# Altium PCB SpaceVNXBaseBoard.PcbDoc
Units mm, origin at the board's own origin, x right, y up, seen from the top; angles counter-clockwise.
Board outline 73 x 84 mm, 2 copper layers (Top Layer, Bottom Layer); 5 components, 0 nets, 108 pads, 0 vias.
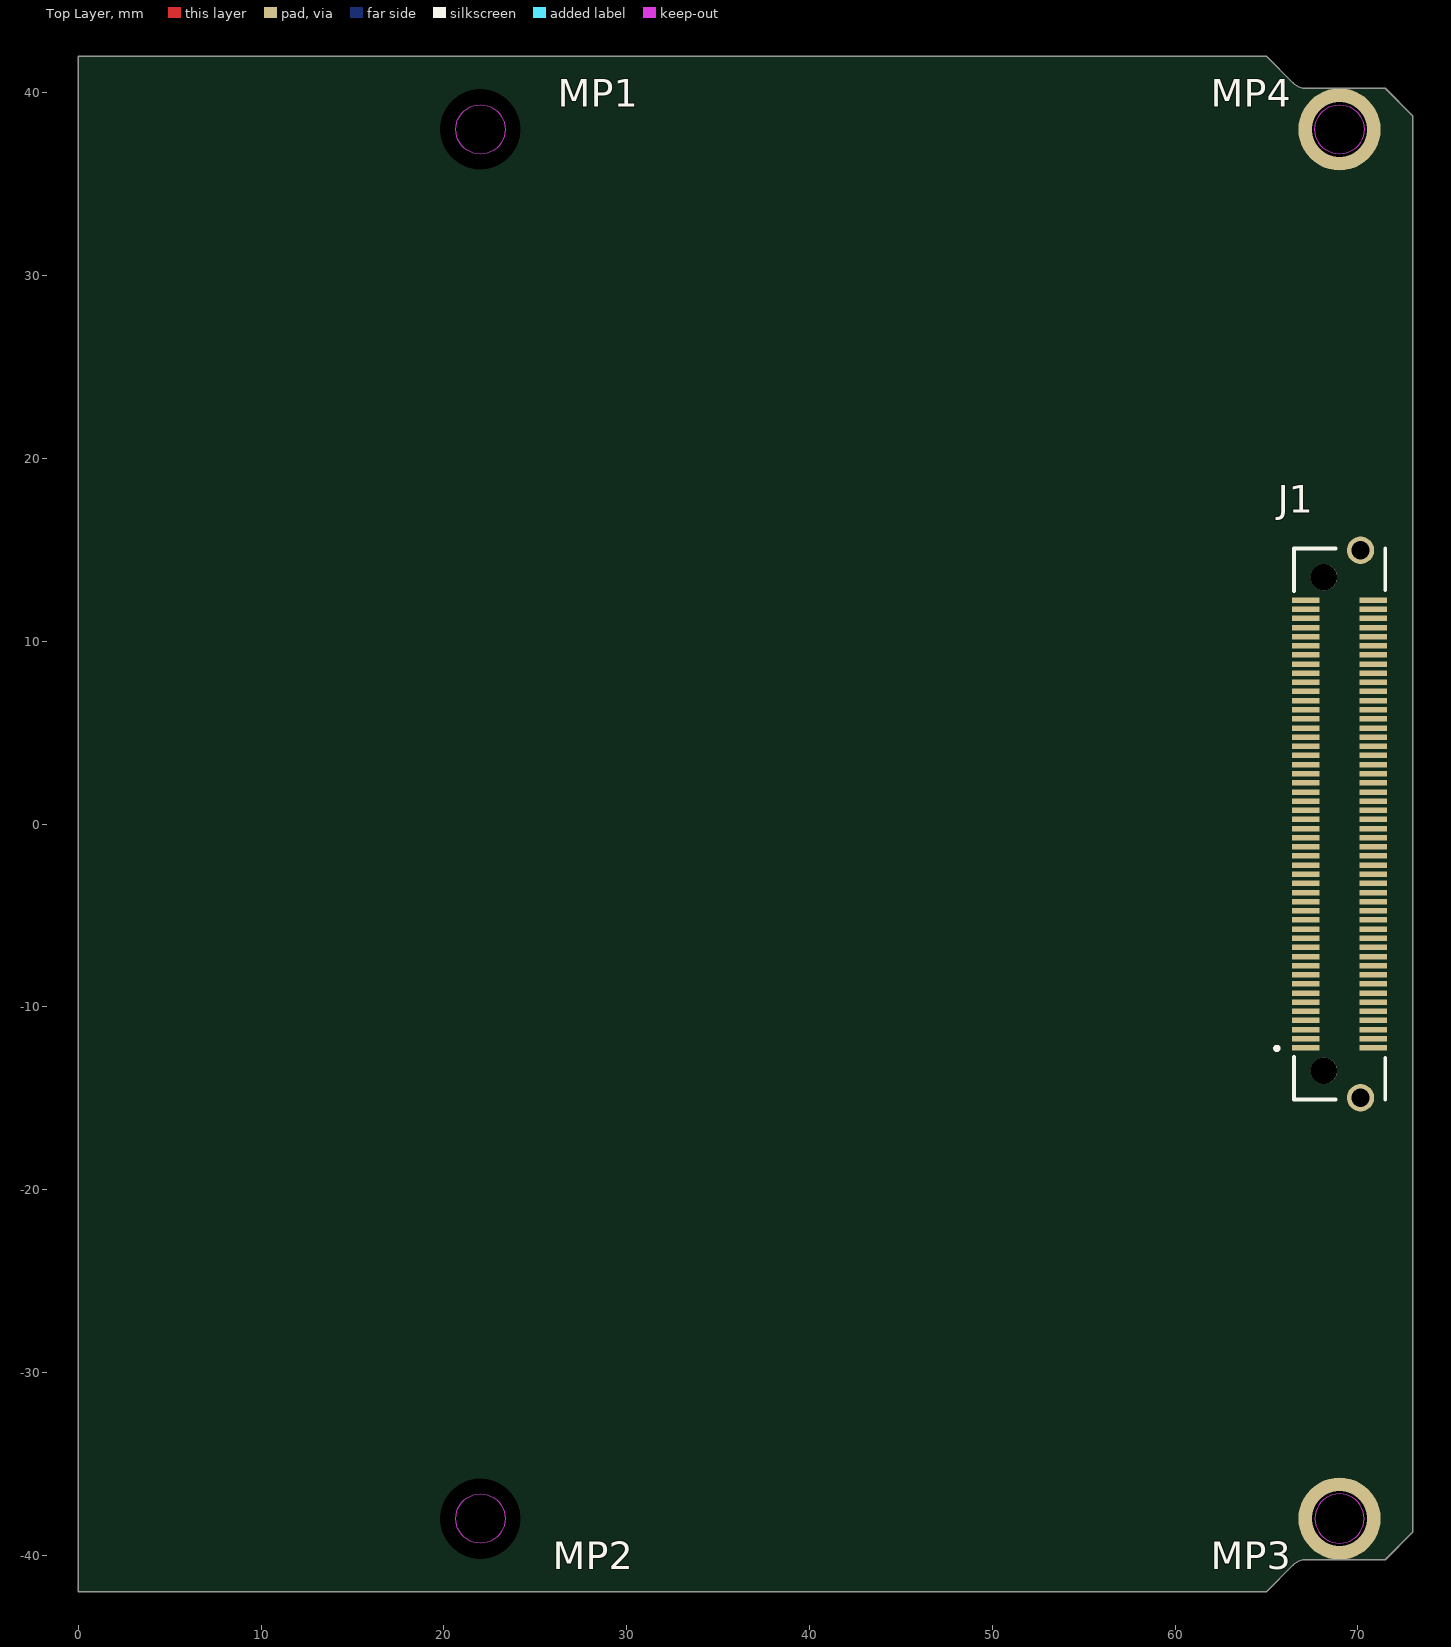
[diagram p0: Top Layer view]
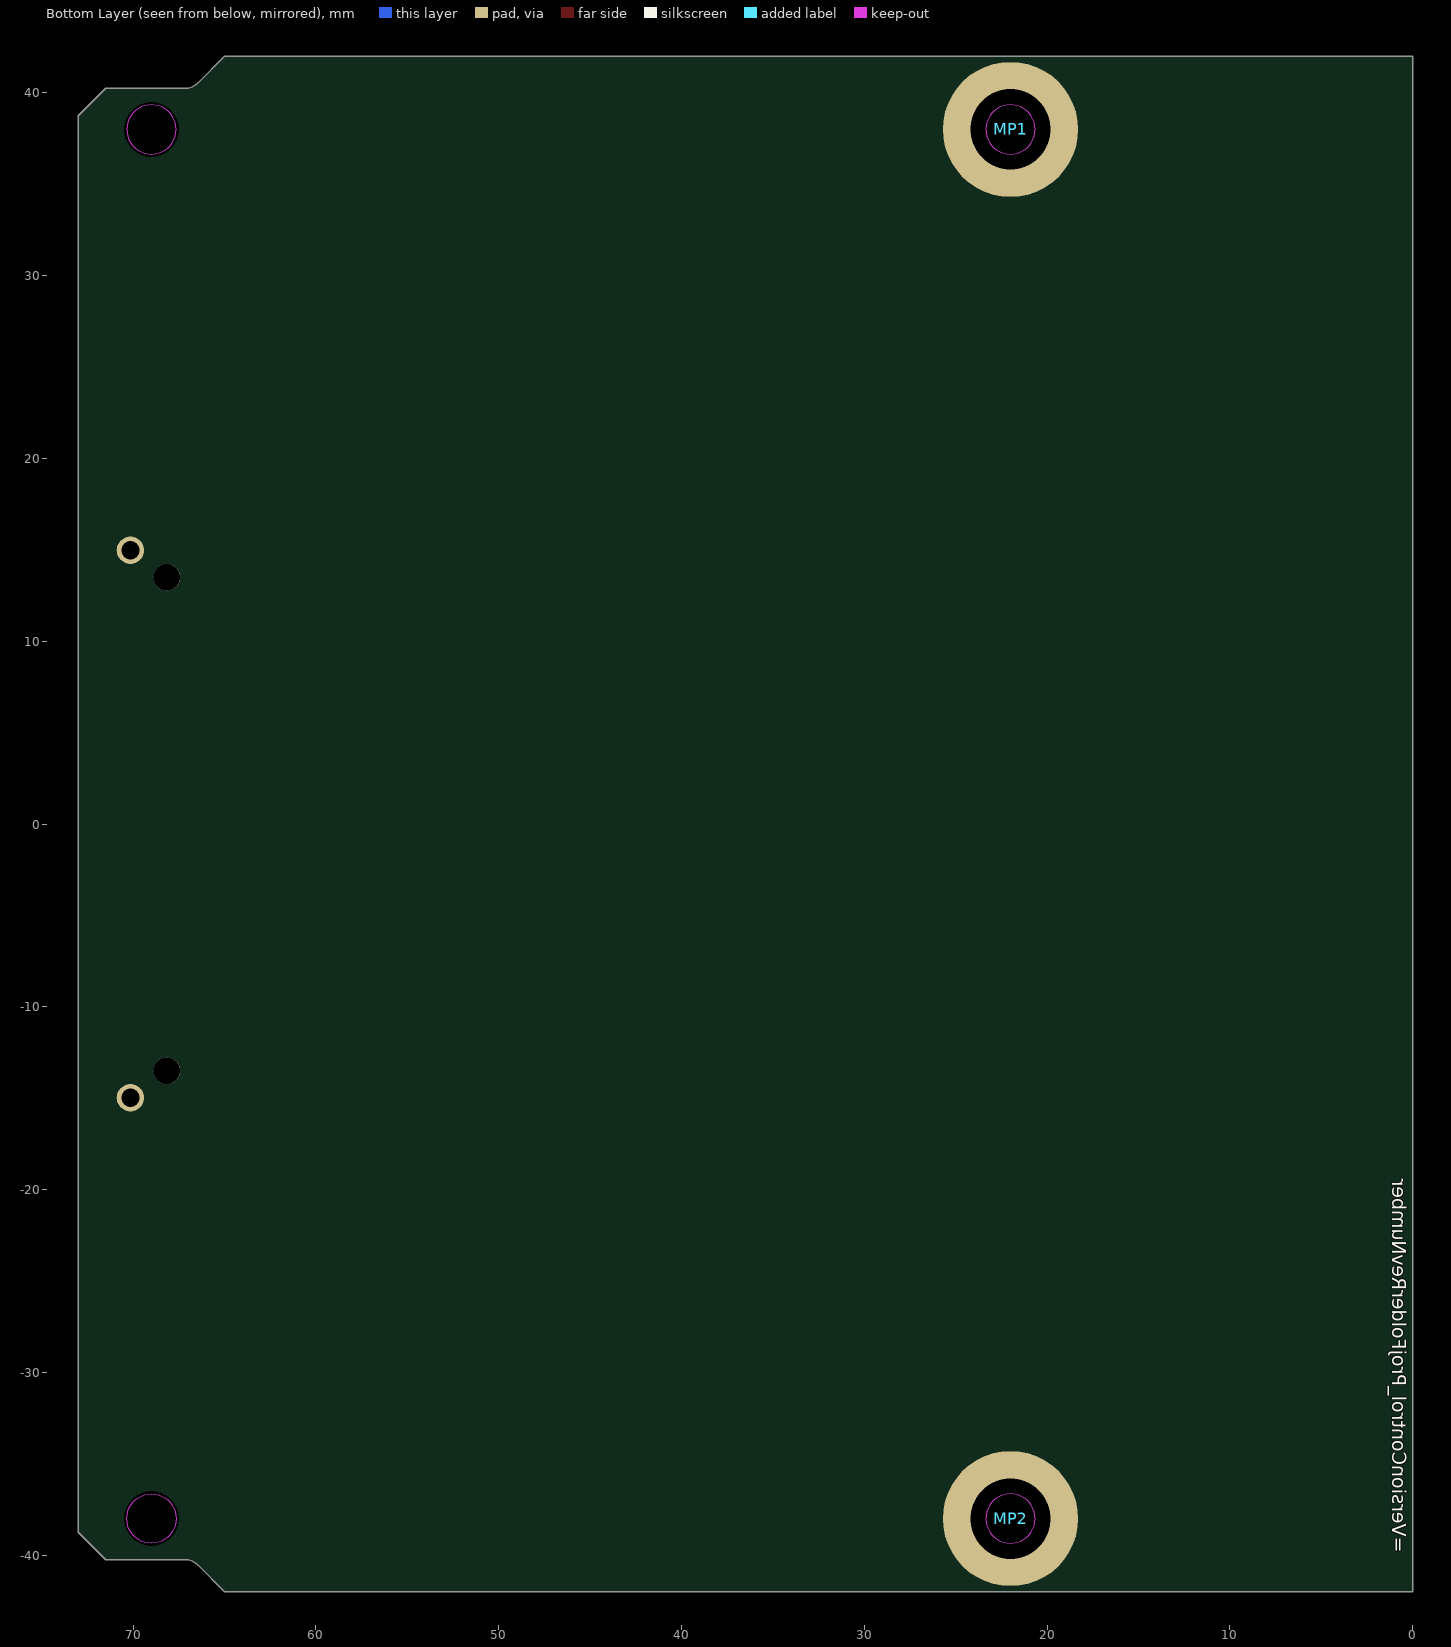
[diagram p1: Bottom Layer view, seen from below]

## Layer stack, top to bottom
Top Solder: solder mask 0.0102, Solder Resist, Dk 3.5
Top Layer: signal copper 0.0356
Dielectric 1: dielectric 0.32, FR-4, Dk 4.8
Bottom Layer: signal copper 0.0356
Bottom Solder: solder mask 0.0102, Solder Resist, Dk 3.5

## Board outline
0,-42 0,42 65,42 66.457,40.543 ccw(c67.164,41.25) 67.164,40.25 71.5,40.25 73,38.75 73,-38.75 71.5,-40.25 67.164,-40.25 ccw(c67.164,-41.25) 66.457,-40.543 65,-42
cut-out: 20.65,-38 cw(c22,-38) 22,-36.65 cw(c22,-38) 23.35,-38 cw(c22,-38) 22,-39.35 cw(c22,-38)
cut-out: 22,36.65 cw(c22,38) 20.65,38 cw(c22,38) 22,39.35 cw(c22,38) 23.35,38 cw(c22,38)
cut-out: 69,36.65 cw(c69,38) 67.65,38 cw(c69,38) 69,39.35 cw(c69,38) 70.35,38 cw(c69,38)
cut-out: 67.65,-38 ccw(c69,-38) 69,-39.35 ccw(c69,-38) 70.35,-38 ccw(c69,-38) 69,-36.65 ccw(c69,-38)

## Design rules (kind name [scope] priority, off if disabled: settings)
Clearance [All] p1: gap=0.254 ignorepadtopadclearanceinfootprint=FALSE except(0: Arc-Hole Track-Hole SMDPad-Hole THPad-Hole Via-Hole Fill-Hole Poly-Hole Region-Hole Text-Hole)
FanoutControl Fanout_BGA [IsBGA] p1: bgadir=Out bgaviamode=Centered fanoutstyle=BGA fanoutdirection=Alternating viagrid=0.025 // Fanout_BGA (Default Rule)
PolygonConnect [All] p1: connectstyle=Relief reliefconductorwidth=0.254 reliefentries=4 polygonreliefangle="90 Angle" airgapwidth=0.254
RoutingVias [All] p1: holewidth=0.711 width=1.27 viastyle="Through Hole" minholewidth=0.711 minwidth=1.27 maxholewidth=0.711 maxwidth=1.27
SolderMaskExpansion [All] p1: expansion=0.102 istentingtop=FALSE
Width [All] p1: maxlimit=0.254 minlimit=0.254 preferedwidth=0.254
29 further rules are at their usual default settings.

## Classes and differential pairs
component class SpaceVNXBaseBoard: MP1 MP2 MP3 MP4

## Components (designator, comment, footprint, x,y, rotation, side; value= is the part's Value field where it differs from the comment)
J1 "LSHM-150-02.5-L-DV-A-S-TR" SAMTEC_LSHM-150-02.5-L-DV-A-S-TR 69,0 r270 top
MP1 "M3x5.1mm" 9775051360 22,38 r180 bottom
MP2 "M3x5.1mm" 9775051360 22,-38 r180 bottom
MP3 "M2x5mm" 9774050243 69,-38 r0 top
MP4 "M2x5mm" 9774050243 69,38 r0 top

## Footprints (in the part's own frame and the unit in brackets; to place one, negate y for a bottom-side part, rotate by r counter-clockwise, add the part's x,y. Pads: shape width x height; smd on the part's side, far side on the other; paste and mask are expansions set on the pad)
9774050243 [mm] "SMT Steel Spacer with internal Thread M2, height 5mm"
  round 4.5 / inner round 0 / far side round 0 hole 3 unplated: 1(0,0)
  body extent -2.17,-2.17 2.18,2.17, height 5
9775051360 [mm] "SMD Steel Spacer M3 Thread Internal, Pin Length 5.1mm"
  round 7.4 / inner round 0 / far side round 0 hole 4.4 unplated paste-403.566: 1(0,0)
  body extent -3,-3 3,3, height 1
SAMTEC_LSHM-150-02.5-L-DV-A-S-TR [mm]
  rect 0.3x1.5 smd: 1(12.25,-1.85) 2(12.25,1.85) 3(11.75,-1.85) 4(11.75,1.85) 5(11.25,-1.85) 6(11.25,1.85) 7(10.75,-1.85) 8(10.75,1.85) 9(10.25,-1.85) 10(10.25,1.85) 11(9.75,-1.85) 12(9.75,1.85) 13(9.25,-1.85) 14(9.25,1.85) 15(8.75,-1.85) 16(8.75,1.85) 17(8.25,-1.85) 18(8.25,1.85) 19(7.75,-1.85) 20(7.75,1.85) 21(7.25,-1.85) 22(7.25,1.85) 23(6.75,-1.85) 24(6.75,1.85) 25(6.25,-1.85) 26(6.25,1.85) 27(5.75,-1.85) 28(5.75,1.85) 29(5.25,-1.85) 30(5.25,1.85) 31(4.75,-1.85) 32(4.75,1.85) 33(4.25,-1.85) 34(4.25,1.85) 35(3.75,-1.85) 36(3.75,1.85) 37(3.25,-1.85) 38(3.25,1.85) 39(2.75,-1.85) 40(2.75,1.85) 41(2.25,-1.85) 42(2.25,1.85) 43(1.75,-1.85) 44(1.75,1.85) 45(1.25,-1.85) 46(1.25,1.85) 47(0.75,-1.85) 48(0.75,1.85) 49(0.25,-1.85) 50(0.25,1.85) 51(-0.25,-1.85) 52(-0.25,1.85) 53(-0.75,-1.85) 54(-0.75,1.85) 55(-1.25,-1.85) 56(-1.25,1.85) 57(-1.75,-1.85) 58(-1.75,1.85) 59(-2.25,-1.85) 60(-2.25,1.85) 61(-2.75,-1.85) 62(-2.75,1.85) 63(-3.25,-1.85) 64(-3.25,1.85) 65(-3.75,-1.85) 66(-3.75,1.85) 67(-4.25,-1.85) 68(-4.25,1.85) 69(-4.75,-1.85) 70(-4.75,1.85) 71(-5.25,-1.85) 72(-5.25,1.85) 73(-5.75,-1.85) 74(-5.75,1.85) 75(-6.25,-1.85) 76(-6.25,1.85) 77(-6.75,-1.85) 78(-6.75,1.85) 79(-7.25,-1.85) 80(-7.25,1.85) 81(-7.75,-1.85) 82(-7.75,1.85) 83(-8.25,-1.85) 84(-8.25,1.85) 85(-8.75,-1.85) 86(-8.75,1.85) 87(-9.25,-1.85) 88(-9.25,1.85) 89(-9.75,-1.85) 90(-9.75,1.85) 91(-10.25,-1.85) 92(-10.25,1.85) 93(-10.75,-1.85) 94(-10.75,1.85) 95(-11.25,-1.85) 96(-11.25,1.85) 97(-11.75,-1.85) 98(-11.75,1.85) 99(-12.25,-1.85) 100(-12.25,1.85)
  round 1.5 hole 1: S1(-14.975,1.15) S2(14.975,1.15)
  round 1.45 hole 1.45 unplated: ""(-13.5,-0.85) ""(13.5,-0.85)
  silkscreen extent -15.07,-3.53 15.07,2.51, body extent -15.4,-2.49 15.4,2.54, height 3.8

## Part data
J1: "100 Position Connector Self Mating, Non-Gendered Surface Mount Gold", ComponentLink1Description=Manufacturer, ComponentLink1URL=https://www.samtec.com/products/lshm
MP1 MP2: library part 9775051360, "WA-SMSR SMT Steel Spacer Reverse with internal Thread M3, Length 5.1mm", Manufacturer="Wurth Elektronik", Operating Temperature="-55 to +150degC", ComponentLink1Description=Manufacturer, ComponentLink1URL=http://www.we-online.de, ComponentLink2Description=Datasheet, ComponentLink2URL=https://www.we-online.com/catalog/datasheet/9775051360.pdf, Hole Diameter=-, Inner Diameter=4.2mm, Manufacturer Part Number=9775051360, Material=Steel, Mounting Technology=SMT, Outer Diameter=6mm, Packaging=Bulk, Pin Length=5.1mm, Published Date="March 2021", Surface=Tin, Thread=M3
MP3 MP4: library part 9774050243, "WA-SMSI SMT Steel Spacer, internal Thread, OD 4.35mm, M2x5mm", Manufacturer="Wurth Elektronik", Operating Temperature="-55 to +150degC", ComponentLink1Description=Manufacturer, ComponentLink1URL=http://www.we-online.de, ComponentLink2Description=Datasheet, ComponentLink2URL=https://www.we-online.com/catalog/datasheet/9774050243.pdf, Inner Diameter=2.8mm, Inner Thread Length=-, Length=5mm, Manufacturer Part Number=9774050243, Material=Steel, Mounting Technology=SMT, Outer Diameter=4.35mm, Packaging=Bulk, Published Date="April 2020", Surface=Tin, Thread=M2

## Nets (pads, with @x,y where several pads share a name; then routed paths per layer and width w, separated by ;. In a path a pad name is that pad's centre, name@x,y a point inside that pad or via, vN(x,y) a via of type N, cw(c..) or ccw(c..) an arc to the next point about the centre after c; other vN are vias at no path point)
pads on no net: J1. J1.1 J1.2 J1.3 J1.4 J1.5 J1.6 J1.7 J1.8 J1.9 J1.10 J1.11 J1.12 J1.13 J1.14 J1.15 J1.16 J1.17 J1.18 J1.19 J1.20 J1.21 J1.22 J1.23 J1.24 J1.25 J1.26 J1.27 J1.28 J1.29 J1.30 J1.31 J1.32 J1.33 J1.34 J1.35 J1.36 J1.37 J1.38 J1.39 J1.40 J1.41 J1.42 J1.43 J1.44 J1.45 J1.46 J1.47 J1.48 J1.49 J1.50 J1.51 J1.52 J1.53 J1.54 J1.55 J1.56 J1.57 J1.58 J1.59 J1.60 J1.61 J1.62 J1.63 J1.64 J1.65 J1.66 J1.67 J1.68 J1.69 J1.70 J1.71 J1.72 J1.73 J1.74 J1.75 J1.76 J1.77 J1.78 J1.79 J1.80 J1.81 J1.82 J1.83 J1.84 J1.85 J1.86 J1.87 J1.88 J1.89 J1.90 J1.91 J1.92 J1.93 J1.94 J1.95 J1.96 J1.97 J1.98 J1.99 J1.100 J1.S1 J1.S2 MP1.1 MP2.1 MP3.1 MP4.1

## Silkscreen, mask and mechanical layers (free items; w line width, h text height)
Bottom Overlay:
  text "=VersionControl_ProjFolderRevNumber" at 1.123,-39.873 h0.75 r90
Top Solder:
  region: 0,-42 65,-42 66.457,-40.543 0,-40.543
  region: 0,42 65,42 66.457,40.543 0,40.543
Mechanical 1:
  lines w0.013: 0,-42 65,-42 66.457,-40.543 cw(c67.164,-41.25) 67.164,-40.25 71.5,-40.25 73,-38.75 73,38.75 71.5,40.25 67.164,40.25 cw(c67.164,41.25) 66.457,40.543 65,42 0,42
Mechanical 2:
  circle w0.013: c22,-38 r1.35
  circle w0.013: c22,38 r1.35
  circle w0.013: c69,-38 r1.35
  circle w0.013: c69,38 r1.35